# Altium PCB Alt_BRD_PowerModules.PcbDoc
Units mm, origin at the board's own origin, x right, y up, seen from the top; angles counter-clockwise.
Board outline 152.4 x 101.6 mm, 2 copper layers (Top Layer, Bottom Layer); 108 components, 67 nets, 271 pads, 11 vias.
Unrouted connection lines stored in the file: 166.
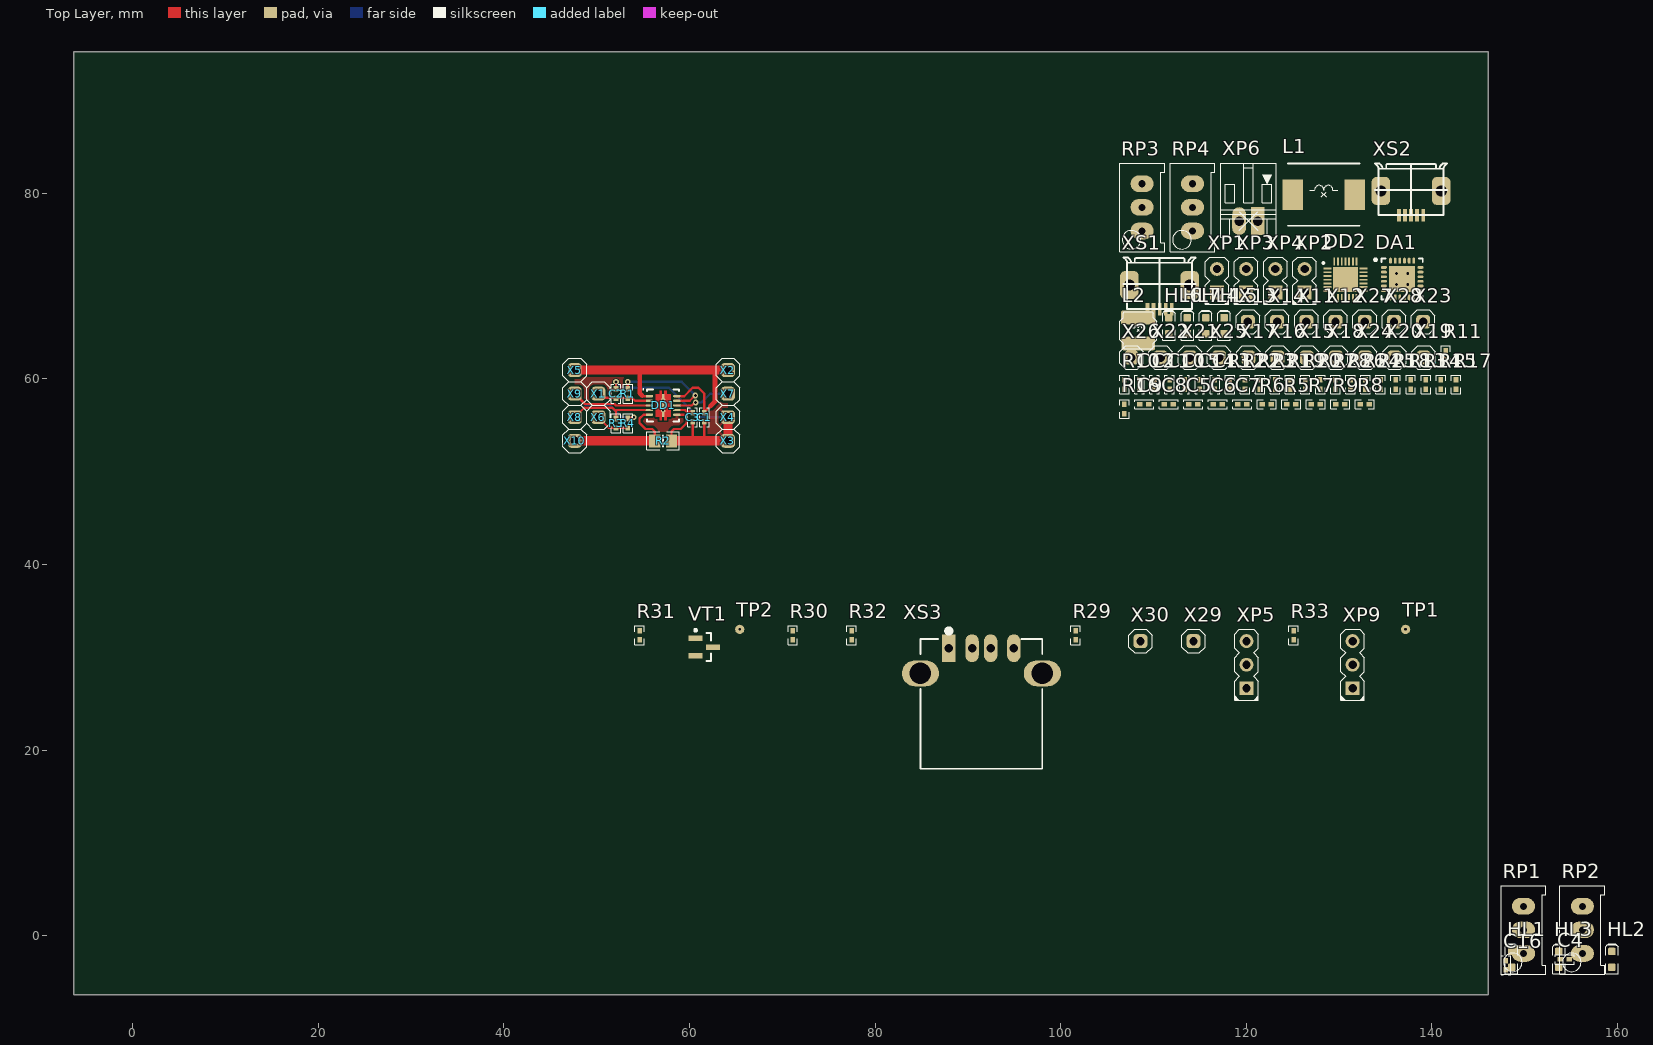
[diagram p0: Top Layer view]
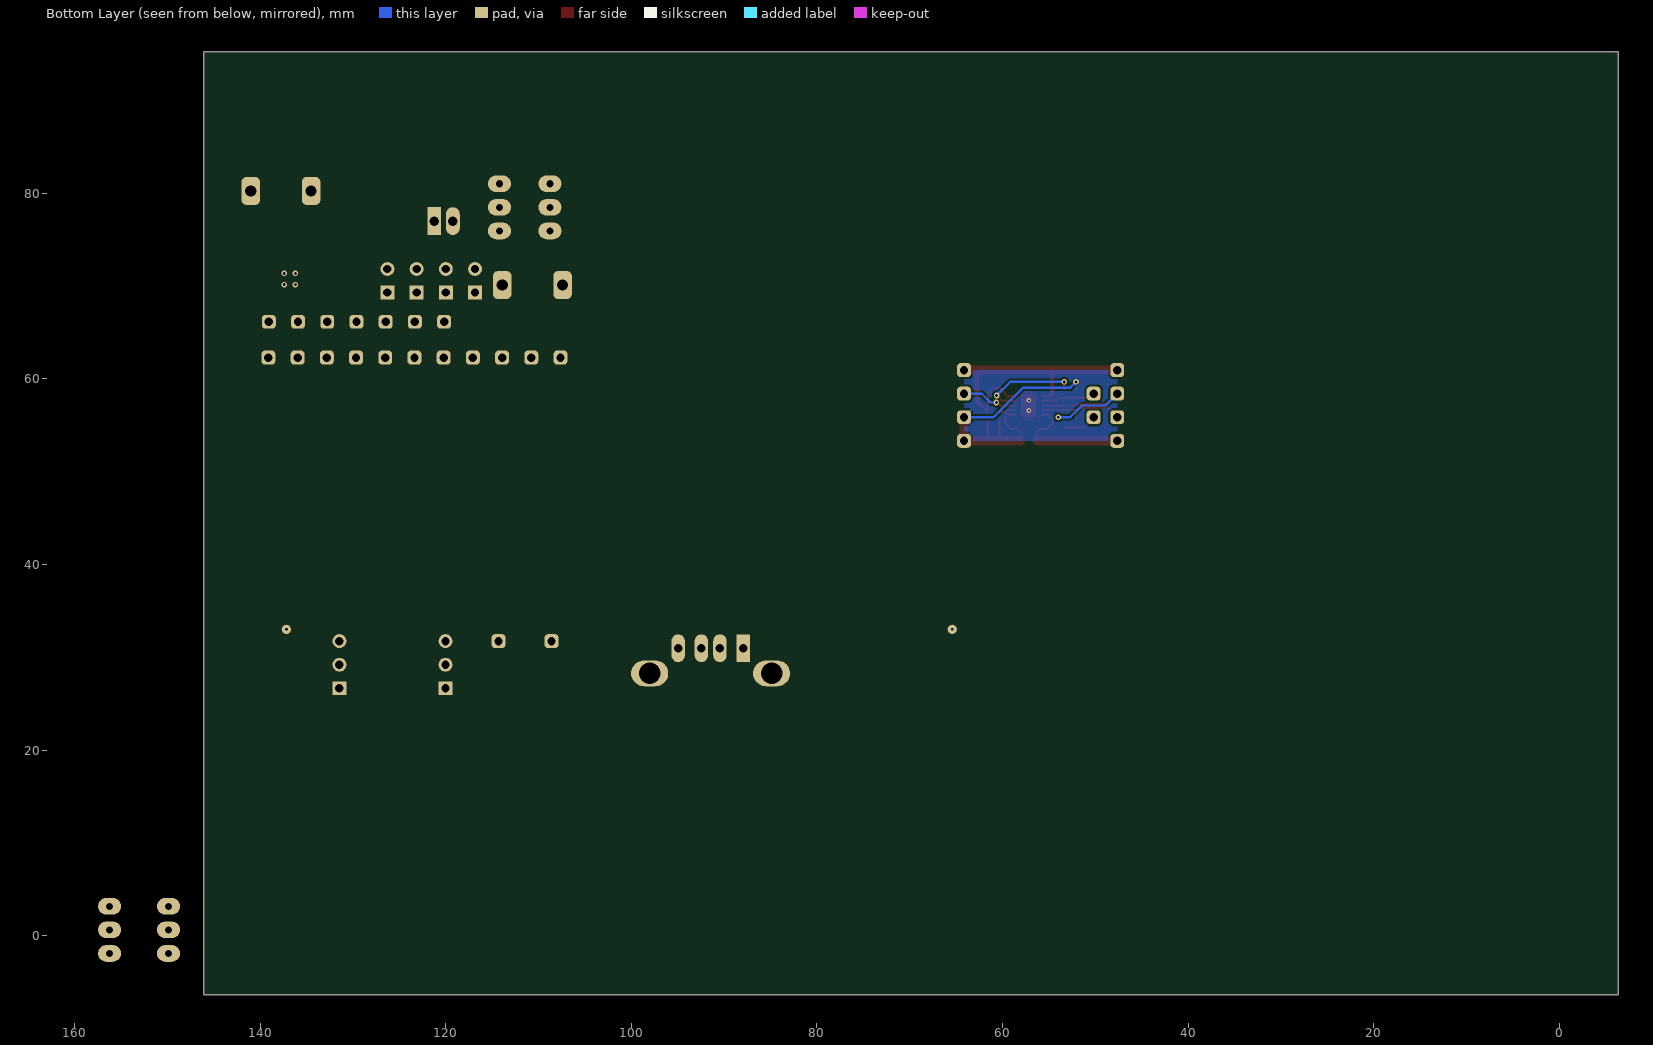
[diagram p1: Bottom Layer view, seen from below]

## Layer stack, top to bottom
Top Solder: solder mask 0.0102, Solder Resist, Dk 3.5
Top Layer: signal copper 0.0356
Dielectric 1: dielectric 0.32, FR-4, Dk 4.8
Bottom Layer: signal copper 0.0356
Bottom Solder: solder mask 0.0102, Solder Resist, Dk 3.5

## Board outline
-6.35,-6.35 146.05,-6.35 146.05,95.25 -6.35,95.25

## Design rules (kind name [scope] priority, off if disabled: settings)
Clearance In_Polygon [InPoly] p1: gap=0.25 ignorepadtopadclearanceinfootprint=FALSE except(0: Arc-Hole Track-Hole SMDPad-Hole THPad-Hole Via-Hole Fill-Hole Poly-Hole Region-Hole Text-Hole)
Clearance [All] p2: gap=0.15 ignorepadtopadclearanceinfootprint=FALSE except(0: Arc-Hole Track-Hole SMDPad-Hole THPad-Hole Via-Hole Fill-Hole Poly-Hole Region-Hole Text-Hole)
PlaneConnect [All] p1: pad.planeconnectstyle=Relief pad.reliefexpansion=0.508 pad.reliefentries=4 pad.reliefconductorwidth=0.254 pad.reliefairgap=0.254 via.planeconnectstyle=Direct via.reliefexpansion=0.508 via.reliefentries=4 via.reliefconductorwidth=0.254 via.reliefairgap=0.254
PolygonConnect [All] p1: thpad.connectstyle=Relief thpad.reliefconductorwidth=0.254 thpad.reliefentries=4 thpad.polygonreliefangle="45 Angle" thpad.airgapwidth=0.254 smdpad.connectstyle=Relief smdpad.reliefconductorwidth=0.254 smdpad.reliefentries=4 smdpad.polygonreliefangle="90 Angle" smdpad.airgapwidth=0.254 via.connectstyle=Direct via.reliefconductorwidth=0.254 via.reliefentries=4 via.polygonreliefangle="90 Angle" via.airgapwidth=0.254
RoutingVias [All] p1: holewidth=0.5 width=0.8 viastyle="Through Hole" minholewidth=0.3 minwidth=0.6 maxholewidth=0.8 maxwidth=1.3
SolderMaskExpansion IsVia [isVia] p1: expansion=0.102 istentingtop=TRUE
SolderMaskExpansion [All] p2: expansion=0.102 istentingtop=FALSE
Width [All] p1: maxlimit=1 minlimit=0.25 preferedwidth=0.5
29 further rules are at their usual default settings.

## Components (designator, comment, footprint, x,y, rotation, side; value= is the part's Value field where it differs from the comment)
C1 "100n 25V" CapKemet1005(0402) 61.595,55.88 r90 top
C2 "10nF" CapKemet1005(0402) 52.07,58.42 r270 top
C3 "100n 25V" CapKemet1005(0402) 60.325,55.88 r90 top
C4 "4.7uF 10V" CapKemet1005(0402) 154.305,-2.54 r0 top
C5 "100n 25V" CapKemet1005(0402) 114.269,57.28 r0 top
C6 "150n" CapKemet1005(0402) 116.909,57.28 r0 top
C7 "1u 10V" CapKemet1005(0402) 119.549,57.28 r0 top
C8 "10u 6.3V 0402" CapKemet1005(0402) 111.629,57.28 r0 top
C9 "1u 10V" CapKemet1005(0402) 108.989,57.28 r0 top
C10 "100n 50V" CapKemet1005(0402) 111.729,59.412 r90 top
C11 "47n 50V" CapKemet1005(0402) 110.105,59.412 r90 top
C12 "4.7u 10v" CapKemet1005(0402) 108.481,59.412 r90 top
C13 "10u 6.3V 0402" CapKemet1005(0402) 116.601,59.412 r90 top
C14 "10u 6.3V 0402" CapKemet1005(0402) 114.977,59.412 r90 top
C15 "10u 6.3V 0402" CapKemet1005(0402) 113.353,59.412 r90 top
C16 "4.7uF 10V" CapKemet1005(0402) 147.955,-3.175 r90 top
DA1 "BQ25606RGER" VQFN-24 136.787,70.772 r0 top
DD1 "MAX17047G+T10" DFN10(3x3)_N 57.15,57.15 r0 top
DD2 "MAX8903AETI+" QFN40P400X400X80-29N 130.677,70.697 r0 top
HL1 "GR-0603" LED-0603-GREEN 148.59,-2.54 r90 top
HL2 "GR-0603" LED-0603-GREEN 159.385,-2.54 r90 top
HL3 "GR-0603" LED-0603-GREEN 153.67,-2.54 r90 top
HL4 "GR-0603" LED-0603-GREEN 115.616,65.747 r90 top
HL5 "GR-0603" LED-0603-GREEN 117.601,65.747 r90 top
HL6 "GR-0603" LED-0603-GREEN 111.646,65.747 r90 top
HL7 "GR-0603" LED-0603-GREEN 113.631,65.747 r90 top
L1 "4.7UH 5A 41 MOHM" INDPM7767X300N 128.335,79.862 r0 top
L2 "1u 3.2A 32.4mOhm" NRS4018 108.349,65.234 r0 top
R1 "10k" "REZKemet 0402" 53.34,58.42 r90 top
R2 "10m 1% 50ppm" RESC2012(0805)N 57.15,53.34 r180 top
R3 "10k" "REZKemet 0402" 52.07,55.245 r90 top
R4 "10k" "REZKemet 0402" 53.34,55.245 r90 top
R5 "10k" "REZKemet 0402" 124.829,57.28 r0 top
R6 "10k" "REZKemet 0402" 122.189,57.28 r0 top
R7 "620" "REZKemet 0402" 127.469,57.28 r0 top
R8 "158" "REZKemet 0402" 132.749,57.28 r0 top
R9 "1k" "REZKemet 0402" 130.109,57.28 r0 top
R10 "221" "REZKemet 0402" 106.857,59.412 r90 top
R11 "2.8k" "REZKemet 0402" 141.485,62.56 r90 top
R12 "2.2k" "REZKemet 0402" 118.225,59.412 r90 top
R13 "2.2k" "REZKemet 0402" 137.713,59.412 r90 top
R14 "10k" "REZKemet 0402" 139.337,59.412 r90 top
R15 "100k" "REZKemet 0402" 140.961,59.412 r90 top
R16 "100k" "REZKemet 0402" 106.857,56.772 r90 top
R17 "10k" "REZKemet 0402" 142.585,59.412 r90 top
R18 "100k" "REZKemet 0402" 136.089,59.412 r90 top
R19 "100k" "REZKemet 0402" 124.721,59.412 r90 top
R20 "680" "REZKemet 0402" 126.345,59.412 r90 top
R21 "680" "REZKemet 0402" 123.097,59.412 r90 top
R22 "12k" "REZKemet 0402" 119.849,59.412 r90 top
R23 "3k" "REZKemet 0402" 121.473,59.412 r90 top
R24 "680" "REZKemet 0402" 132.841,59.412 r90 top
R25 "680" "REZKemet 0402" 134.465,59.412 r90 top
R26 "600" "REZKemet 0402" 131.217,59.412 r90 top
R27 "5.23k" "REZKemet 0402" 127.969,59.412 r90 top
R28 "30.1k" "REZKemet 0402" 129.593,59.412 r90 top
R29 "10k" "REZKemet 0402" 101.6,32.385 r90 top
R30 "121k" "REZKemet 0402" 71.12,32.385 r90 top
R31 "49.9k" "REZKemet 0402" 54.61,32.385 r90 top
R32 "10k" "REZKemet 0402" 77.47,32.385 r90 top
R33 "10k" "REZKemet 0402" 125.095,32.385 r90 top
RP1 "10K" 3296W_1 149.86,0.635 r0 top
RP2 "10K" 3296W_1 156.21,0.635 r0 top
RP3 "10K" 3296W_1 108.764,78.497 r0 top
RP4 "10K" 3296W_1 114.202,78.497 r0 top
TP1 "TP(No BOM)" PLLS1.27-1-R 137.16,33.02 r90 top
TP2 "TP(No BOM)" PLLS1.27-1-R 65.405,33.02 r90 top
VT1 "N-CH  190mА 60V" SOT23-3N 61.595,31.115 r0 top
X1 "X1-PLS-1" HoleSolderPLS-1 50.165,58.42 r0 top
X2 "X1-PLS-1" HoleSolderPLS-1 64.135,60.96 r0 top
X3 "X1-PLS-1" HoleSolderPLS-1 64.135,53.34 r0 top
X4 "X1-PLS-1" HoleSolderPLS-1 64.135,55.88 r0 top
X5 "X1-PLS-1" HoleSolderPLS-1 47.625,60.96 r0 top
X6 "X1-PLS-1" HoleSolderPLS-1 50.165,55.88 r0 top
X7 "X1-PLS-1" HoleSolderPLS-1 64.135,58.42 r0 top
X8 "X1-PLS-1" HoleSolderPLS-1 47.625,55.88 r0 top
X9 "X1-PLS-1" HoleSolderPLS-1 47.625,58.42 r0 top
X10 "X1-PLS-1" HoleSolderPLS-1 47.625,53.34 r0 top
X11 "X1-PLS-1" HoleSolderPLS-1 126.463,66.166 r0 top
X12 "X1-PLS-1" HoleSolderPLS-1 129.611,66.166 r0 top
X13 "X1-PLS-1" HoleSolderPLS-1 120.167,66.166 r0 top
X14 "X1-PLS-1" HoleSolderPLS-1 123.315,66.166 r0 top
X15 "X1-PLS-1" HoleSolderPLS-1 126.507,62.306 r0 top
X16 "X1-PLS-1" HoleSolderPLS-1 123.359,62.306 r0 top
X17 "X1-PLS-1" HoleSolderPLS-1 120.211,62.306 r0 top
X18 "X1-PLS-1" HoleSolderPLS-1 129.655,62.306 r0 top
X19 "X1-PLS-1" HoleSolderPLS-1 139.099,62.306 r0 top
X20 "X1-PLS-1" HoleSolderPLS-1 135.951,62.306 r0 top
X21 "X1-PLS-1" HoleSolderPLS-1 113.915,62.306 r0 top
X22 "X1-PLS-1" HoleSolderPLS-1 110.767,62.306 r0 top
X23 "X1-PLS-1" HoleSolderPLS-1 139.055,66.166 r0 top
X24 "X1-PLS-1" HoleSolderPLS-1 132.803,62.306 r0 top
X25 "X1-PLS-1" HoleSolderPLS-1 117.063,62.306 r0 top
X26 "X1-PLS-1" HoleSolderPLS-1 107.619,62.306 r0 top
X27 "X1-PLS-1" HoleSolderPLS-1 132.759,66.166 r0 top
X28 "X1-PLS-1" HoleSolderPLS-1 135.907,66.166 r0 top
X29 "X1-PLS-1" HoleSolderPLS-1 114.3,31.75 r0 top
X30 "X1-PLS-1" HoleSolderPLS-1 108.585,31.75 r0 top
XP1 "PLS-2_Jump" PLS-2-3D 116.83,69.314 r90 top
XP2 "PLS-2_Jump" PLS-2-3D 126.274,69.314 r90 top
XP3 "PLS-2_Jump" PLS-2-3D 119.978,69.314 r90 top
XP4 "PLS-2_Jump" PLS-2-3D 123.126,69.314 r90 top
XP5 "PLS-3" PLS-3-3D 120.015,26.67 r90 top
XP6 "440055-2" 440055-2 120.225,77.012 r0 top
XP9 "PLS-3" PLS-3-3D 131.445,26.67 r90 top
XS1 "10118193-0001LF" 10118193-0001LF 110.651,70.224 r0 top
XS2 "10118193-0001LF" 10118193-0001LF 137.746,80.362 r0 top
XS3 "USB-A-R" USB-A-S-RA 91.44,29.845 r0 top

## Footprints (in the part's own frame and the unit in brackets; to place one, negate y for a bottom-side part, rotate by r counter-clockwise, add the part's x,y. Pads: shape width x height; smd on the part's side, far side on the other; paste and mask are expansions set on the pad)
3296W_1 [mm] "BOURNS 10-turn trimmer, 3296W type (THT)"
  oval 2.5x1.8 hole 0.762: 1(0,-2.54) 2(0,0) 3(0,2.54)
  silkscreen extent -2.42,-4.77 2.41,4.76, body extent -2.4,-4.77 2.4,4.76, height 11.55
440055-2 [mm] "CONN HEADER 2POS R/A 2MM T/H"
  rect 1.5x3 hole 1: 1(1,0)
  oval 1.5x3 hole 1: 2(-1,0)
  silkscreen extent -3,-1.75 3,6.25
10118193-0001LF [mm]
  rect 0.4x1.35 smd: 1(1.3,-2.7) 2(0.65,-2.7) 3(0,-2.7) 4(-0.65,-2.7) 5(-1.3,-2.7)
  rrect50% 2x3 hole 1.2: 6(-3.25,-0.1) 6(3.25,-0.1)
  silkscreen extent -3.88,-2.7 3.88,2.85, body extent -3.93,-3 3.93,2.66, height 3.18
CapKemet1005(0402) [mm] "Chip Capacitor, Body 1.0x0.5mm, IPC High Density"
  rect 0.6x0.5 smd: 1(-0.5,0) 2(0.5,0)
  silkscreen extent -1.02,-0.51 1.02,0.51, body extent -0.5,-0.3 0.5,0.3, height 0.2
DFN10(3x3)_N [mm] "SON, 10-Leads, Body 3x3mm, Pitch 0.5mm, Thermal Pad 2.45x1.6mm, IPC Medium Density"
  oval 0.8x0.25 smd: 1(-1.475,1) 2(-1.475,0.5) 3(-1.475,0) 4(-1.475,-0.5) 5(-1.475,-1) 6(1.475,-1) 7(1.475,-0.5) 8(1.475,0) 9(1.475,0.5) 10(1.475,1)
  rect 0.25x2.45 smd paste+0 mask+0: 11(0,0)
  Top Layer region: -0.8,-1.225 -0.375,-1.225 -0.375,-1.575 -0.125,-1.575 -0.125,-1.225 0.125,-1.225 0.125,-1.575 0.375,-1.575 0.375,-1.225 0.8,-1.225 0.8,1.225 0.375,1.225 0.375,1.575 0.125,1.575 0.125,1.225 -0.125,1.225 -0.125,1.575 -0.375,1.575 -0.375,1.225 -0.8,1.225
  silkscreen extent -2.17,-1.73 1.73,1.77, body extent -1.51,-1.5 1.51,1.5, height 0.76
HoleSolderPLS-1 [mm] "Connector; Header; 1 Position"
  rrect50% 1.5x1.5 hole 0.9: 1(0,0)
  silkscreen extent -1.27,-1.27 1.27,1.27
INDPM7767X300N [mm]
  rect 2.2x3.25 smd: 1(-3.35,0) 2(3.35,0)
  silkscreen extent -3.85,-3.35 3.85,3.35, body extent -3.85,-3.35 3.85,3.35, height 3
LED-0603-GREEN [mm]
  round 0.254 on Mech15: 0(0,0)
  rrect25% 0.8x0.8 smd: A(-0.85,0) K(0.85,0)
  Top Layer pour cut-out: -0.5,0.5 0.5,0.5 0.5,-0.5 -0.5,-0.5
  silkscreen extent -1.55,-0.67 1.68,0.67, body extent -0.8,-0.4 0.8,0.4, height 0.75
NRS4018 [mm]
  rrect25% 3.6x1.5 smd: 1(0,-1.4)
  rrect25% 3.7x1.5 smd: 2(0,1.4)
  silkscreen extent -2,-2 2,2, body extent -2,-2.2 2,2.2, height 1.8
PLLS1.27-1-R [mm]
  round 1 hole 0.3: 1(0,0)
PLS-2-3D [mm] "Connector; Header; 2 Position"
  rect 1.5x1.5 hole 0.9: 1(0,0)
  round 1.5 hole 0.9: 2(2.54,0)
  silkscreen extent -1.27,-1.27 3.81,1.27, body extent -1.27,-1.27 3.81,1.27, height 8.44
PLS-3-3D [mm] "Connector; Header; 3 Position"
  rect 1.5x1.5 hole 0.9: 1(0,0)
  round 1.5 hole 0.9: 2(2.54,0) 3(5.08,0)
  silkscreen extent -1.27,-1.27 6.35,1.27, body extent -1.27,-1.27 6.35,1.27, height 8.44
QFN40P400X400X80-29N [mm]
  rect 0.85x0.2 smd: 1(-1.95,1.2) 2(-1.95,0.8) 3(-1.95,0.4) 4(-1.95,0) 5(-1.95,-0.4) 6(-1.95,-0.8) 7(-1.95,-1.2) 15(1.95,-1.2) 16(1.95,-0.8) 17(1.95,-0.4) 18(1.95,0) 19(1.95,0.4) 20(1.95,0.8) 21(1.95,1.2)
  rect 0.2x0.85 smd: 8(-1.2,-1.95) 9(-0.8,-1.95) 10(-0.4,-1.95) 11(0,-1.95) 12(0.4,-1.95) 13(0.8,-1.95) 14(1.2,-1.95) 22(1.2,1.95) 23(0.8,1.95) 24(0.4,1.95) 25(0,1.95) 26(-0.4,1.95) 27(-0.8,1.95) 28(-1.2,1.95)
  rect 2.7x2.7 smd: 29(0,0)
  silkscreen extent -2.47,1.7 -2.27,1.9, body extent -2.05,-2.05 2.05,2.05, height 0.8
RESC2012(0805)N [mm] "Chip Resistor, Body 2.0x1.3mm, IPC Medium Density"
  rect 1.2x1.4 smd: 1(-0.9,0) 2(0.9,0)
  silkscreen extent -1.75,-0.97 1.75,0.97, body extent -1,-0.62 1,0.64, height 0.78
"REZKemet 0402" [mm] "Chip Capacitor, Body 1.0x0.5mm, IPC High Density"
  rect 0.6x0.5 smd: 1(-0.5,0) 2(0.5,0)
  silkscreen extent -1.02,-0.51 1.02,0.51, body extent -0.5,-0.3 0.5,0.3, height 0.2
SOT23-3N [mm] "SOT23, 3-Leads, Body 2.9x1.3mm, Pitch 0.95mm, Lead Span 2.5mm, IPC Medium Density"
  rect 1.5x0.6 smd: 1(-0.95,0.95) 2(-0.95,-0.95) 3(0.95,0)
  silkscreen extent -1.07,-1.5 0.7,1.92, body extent -1.57,-1.5 1.57,1.5, height 1
USB-A-S-RA [mm]
  rect 1.45x3 hole 0.92: 1(-3.5,1.144)
  oval 1.45x3 hole 0.92: 2(-1,1.144) 3(1,1.144) 4(3.5,1.144)
  oval 4x2.8 hole 2.3: 5(-6.57,-1.566) 6(6.57,-1.566)
  silkscreen extent -6.57,-11.85 6.57,3.25, body extent -8.12,-11.85 8.12,2.15, height 7.01
VQFN-24 [mm] "QFN, 24-Leads, Body 4x4mm, Pitch 0.5mm, IPC High Density"
  oval 0.65x0.3 smd: 1(-1.975,1.25) 2(-1.975,0.75) 3(-1.975,0.25) 4(-1.975,-0.25) 5(-1.975,-0.75) 6(-1.975,-1.25) 13(1.975,-1.25) 14(1.975,-0.75) 15(1.975,-0.25) 16(1.975,0.25) 17(1.975,0.75) 18(1.975,1.25)
  oval 0.3x0.65 smd: 7(-1.25,-1.975) 8(-0.75,-1.975) 9(-0.25,-1.975) 10(0.25,-1.975) 11(0.75,-1.975) 12(1.25,-1.975) 19(1.25,1.975) 20(0.75,1.975) 21(0.25,1.975) 22(-0.25,1.975) 23(-0.75,1.975) 24(-1.25,1.975)
  rect 2.8x2.8 smd: 25(0,0)
  silkscreen extent -3,-2.22 2.22,2.22, body extent -2.05,-2.07 2.05,2.03, height 1

## Part data
C1 C3 C5: library part 04023C104KAT2A, "0.1µF ±10% 25V Ceramic Capacitor X7R 0402 (1005 Metric)", Digi-Key Part Number=478-7868-1-ND, HelpURL=https://www.digikey.com/en/products/detail/avx-corporation/04023C104KAT2A/3079747, Manufacturer Part Number=04023C104KAT2A, Mouser Part Number=478-7868-1-ND, Part Number=04023C104KAT2A, Price$=0.1
C2: library part CC0402KRX7R9BB103, "10nF 0402 50V X7R  +/-10%", Mouser Part Number=603-CC402KRX7R9BB103, Package=0402, HelpURL=https://eu.mouser.com/ProductDetail/Yageo/CC0402KRX7R9BB103?qs=%2Fha2pyFaduhfwZVzbL0cyr%2Fi%2F48Qij%2FpexQf186TfJSesVd37kSFIA%3D%3D, Manufacturer Part Number=CC0402KRX7R9BB103, Part Number=CC0402KRX7R9BB103, Price$=0.1
C4 C16: library part GRM155R61A475MEAAD, "CAP CER 4.7UF 10V X5R 0402", Digi-Key Part Number=490-14306-1-ND, Package=0402, HelpURL=https://www.digikey.com/product-detail/en/GRM155R61A475MEAAD/490-14306-1-ND/6234742/?itemSeq=332893833, Manufacturer Part Number=GRM155R61A475MEAAD, Part Number=GRM155R61A475MEAAD, Price$=0.04954
C6: library part CAPC1005(0402)N, Package=0402, Part Number=CAPC1005(0402)N
C7: library part CAPC1005(0402)N, "CAP CER 1UF 10V 10% X6S 0402", Manufacturer Part Number=LMK105BJ105KPLF, Mouser Part Number=963-LMK105BJ105KPLF, Package=0402, HelpURL=https://eu.mouser.com/ProductDetail/Taiyo-Yuden/LMK105BJ105KPLF?qs=sGAEpiMZZMs0AnBnWHyRQIHQ3Mw87cdo1QzgwSlYWOQcjHYBR0FFrA%3D%3D, Part Number=CAPC1005(0402)N, Price$=0.11
C8 C13 C14 C15: library part CAPC1005(0402)N, "CAP CER 10UF 6.3V X5R 0402", Digi-Key Part Number=490-13211-1-ND, Manufacturer Part Number=GRJ155R60J106ME11D, Code_JEDEC=0402, HelpURL=https://www.digikey.com/product-detail/en/murata-electronics-north-america/GRJ155R60J106ME11D/490-13211-1-ND/5877419, Part Number=CAPC1005(0402)N, Price$=0.24
C9: library part CAPC1005(0402)N, "CAP CER 1UF 10V 10% X6S 0402", Digi-Key Part Number=1276-6805-1-ND, Manufacturer Part Number=CL05X105KP5NNNC, Code_JEDEC=0402, HelpURL=https://www.digikey.com/product-detail/en/samsung-electro-mechanics/CL05X105KP5NNNC/1276-6805-1-ND/5961664, Part Number=CAPC1005(0402)N, Price$=0.11
C10: library part CAPC1005(0402)N, "CAP CER 0.1UF 25V X5R 0402", Digi-Key Part Number=732-7495-1-ND, Manufacturer Part Number=885012105018, Code_JEDEC=0402, HelpURL=https://www.digikey.com/product-detail/en/wurth-electronics-inc/885012105018/732-7495-1-ND/5454122, Part Number=CAPC1005(0402)N, Price$=0.11
C11: library part CAPC1005(0402)N, "CAP CER 0.047UF 50V X7R 0402", Digi-Key Part Number=490-13297-1-ND, Manufacturer Part Number=GCM155R71H473KE02D, Code_JEDEC=0402, HelpURL=https://www.digikey.com/product-detail/en/murata-electronics-north-america/GCM155R71H473KE02D/490-13297-1-ND/5973321, Part Number=CAPC1005(0402)N, Price$=0.1
C12: library part CAPC1005(0402)N, "CAP CER 4.7UF ±20% 10V X5R 0402", Digi-Key Part Number=490-14306-1-ND, Manufacturer Part Number=GRM155R61A475MEAAD, Code_JEDEC=0402, HelpURL=https://www.digikey.com/product-detail/en/murata-electronics-north-america/GRM155R61A475MEAAD/490-14306-1-ND/6234742, Part Number=CAPC1005(0402)N, Price$=0.23
DA1: "IC BATT CHG LI-ION 1 CELL 24VQFN", Digi-Key Part Number=296-47743-1-ND, HelpURL=https://www.digikey.com/product-detail/en/texas-instruments/BQ25606RGER/296-47743-1-ND/8133092, Manufacturer Part Number=BQ25606RGER, Part Number=BQ25606RGER, Price$=2.76
DD1: "IC BATT MONITOR LI-ION 10TDFN", Digi-Key Part Number=MAX17047G+T10-ND, Package=TDFN-10, HelpURL=https://www.digikey.com/en/products/detail/maxim-integrated/MAX17047G-T10/3758920?s=N4IgTCBcDaILIEEAaBGA7ABgCxpAXQF8g, Manufacturer Part Number=MAX17047G+T10, Part Number=MAX17047G+T10
DD2: "IC BATT CHG LI-ION 1CELL 28TQFN", Digi-Key Part Number=MAX8903AETI+-ND, Manufacturer_Name="Maxim Integrated", Mouser Part Number=700-MAX8903AETI, Datasheet Link=https://componentsearchengine.com/Datasheets/2/MAX8903AETI+.pdf, Height=0.8mm, HelpURL=https://www.digikey.com/en/products/detail/maxim-integrated/MAX8903AETI/2061975, Manufacturer Part Number=MAX8903AETI+, Manufacturer_Part_Number=MAX8903AETI+, Mouser Price/Stock=https://www.mouser.co.uk/ProductDetail/Maxim-Integrated/MAX8903AETI%2b?qs=Mqkh4jHMT8xkuEtUKQzR8g%3D%3D, Part Number=MAX8903AETI+, Price$=4.02000
HL1 HL2 HL3 HL4 HL5 HL6 HL7: library part 150060VS55040, "LED GREEN DIFFUSED 0603 SMD", Digi-Key Part Number=732-12017-1-ND, Mouser Part Number=710-150060VS55040, Package=0603, HelpURL=https://www.mouser.com/ProductDetail/Wurth-Elektronik/150060VS55040?qs=%2Fha2pyFaduhwKZlJ%252BauMPGbe2qb%2FJX%2FXBiS9WUTr3iltzze5OTUvag%3D%3D, Manufacturer Part Number=150060VS55040, Part Number=150060VS55040, Price$=0.115
L1: library part MPLC0730L4R7, "FIXED IND 4.7UH 5A 41 MOHM SMD", Digi-Key Part Number=399-10992-1-ND, Package="SMD 2 pin", HelpURL=https://www.digikey.com/en/products/detail/kemet/MPLC0730L4R7/4506444, LatestRevisionDate=17-Jul-2002, LatestRevisionNote="Re-released for DXP Platform.", Manufacturer Part Number=MPLC0730L4R7, PackageDescription="Axial Device, Thru-Hole; 2 Leads; 0.9 in Pin Spacing", PackageReference=AXIAL-0.9, Part Number=MPLC0730L4R7, Price$=0.39100, Published=24-Mar-1999, Publisher="Altium Limited"
L2: library part NRS4018T1R0NDGJ, "FIXED IND 1UH 3.2A 32.4 MOHM SMD", Digi-Key Part Number=587-2888-1-ND, HelpURL=https://www.digikey.com/product-detail/en/taiyo-yuden/NRS4018T1R0NDGJ/587-2888-1-ND/2649008, Manufacturer Part Number=NRS4018T1R0NDGJ, Part Number=NRS4018T1R0NDGJ, Price$=0.29
R1 R3 R4 R5 R6 R14 R17 R29 R30 R31 R32 R33: library part RESC1005(0402), "RES 10K OHM 1% 1/16W 0402", Manufacturer Part Number=CRCW040210K0FKEDC, Mouser Part Number=71-CRCW040210K0FKEDC, Package=0402, HelpURL=https://eu.mouser.com/ProductDetail/Vishay-Dale/CRCW040210K0FKEDC?qs=sGAEpiMZZMvdGkrng054t0DrEhLhGh8ghRTPC4LoFoV0V5heIyAs3Q%3D%3D, Part Number=RESC1005(0402), Price$=0.1
R2: library part KRL1220E-M-R010-F-T5, "RES SMD 0805 10m 1% 50ppm", Mouser Part Number=408-1544-1-ND, Package=0805, HelpURL=https://www.digikey.com/en/products/detail/susumu/KRL1220E-M-R010-F-T5/3737970, Manufacturer Part Number=KRL1220E-M-R010-F-T5, Part Number=KRL1220E-M-R010-F-T5, Price$=0.09440
R7: library part RESC1005(0402), "RES SMD 620 OHM 1% 1/16W 0402", Digi-Key Part Number=311-620LRCT-ND, Manufacturer Part Number=RC0402FR-07620RL, Code_JEDEC=0402, HelpURL=https://www.digikey.com/product-detail/en/yageo/RC0402FR-07620RL/311-620LRCT-ND/729595, Part Number=RESC1005(0402), Price$=0.1
R8: library part RESC1005(0402), "RES SMD 158 OHM 1% 1/10W 0402", Digi-Key Part Number=P158LCT-ND, Manufacturer Part Number=ERJ-2RKF1580X, Code_JEDEC=0402, HelpURL=https://www.digikey.com/product-detail/en/panasonic-electronic-components/ERJ-2RKF1580X/P158LCT-ND/194195, Part Number=RESC1005(0402), Price$=0.1
R9: library part RESC1005(0402), "RES SMD 1K OHM 0.5% 1/16W 0402", Digi-Key Part Number=RR05P1.0KDCT-ND, Manufacturer Part Number=RR0510P-102-D, Code_JEDEC=0402, HelpURL=https://www.digikey.com/product-detail/en/susumu/RR0510P-102-D/RR05P1.0KDCT-ND/432937, Part Number=RESC1005(0402), Price$=0.1
R10: library part RESC1005(0402), "RES 221 OHM 1% 1/16W 0402", Digi-Key Part Number=RMCF0402FT221RCT-ND, Manufacturer Part Number=RMCF0402FT221R, Code_JEDEC=0402, HelpURL=https://www.digikey.com/product-detail/en/stackpole-electronics-inc/RMCF0402FT221R/RMCF0402FT221RCT-ND/2417580, Part Number=RESC1005(0402), Price$=0.1
R11: library part RESC1005(0402), "RES 2.8K OHM 1% 1/10W 0402", Digi-Key Part Number=2019-RK73H1ETTP2801FCT-ND, Manufacturer Part Number=RK73H1ETTP2801F, Code_JEDEC=0402, HelpURL=https://www.digikey.com/product-detail/en/koa-speer-electronics-inc/RK73H1ETTP2801F/2019-RK73H1ETTP2801FCT-ND/9846507, Part Number=RESC1005(0402), Price$=0.1
R12 R13: library part RESC1005(0402), "RES SMD 2.2K OHM 1% 1/16W 0402", Digi-Key Part Number=311-2.20KLRCT-ND, Manufacturer Part Number=RC0402FR-072K2L, Code_JEDEC=0402, HelpURL=https://www.digikey.com/product-detail/en/yageo/RC0402FR-072K2L/311-2.20KLRCT-ND/729500, Part Number=RESC1005(0402), Price$=0.1
R15 R16 R18 R19 R20 R21 R22 R23 R24 R25 R26: library part RESC1005(0402), Package=0402, Part Number=RESC1005(0402)
R27: library part RESC1005(0402), "RES 5.23K OHM 1% 1/16W 0402", Digi-Key Part Number=RMCF0402FT5K23CT-ND, Manufacturer Part Number=RMCF0402FT5K23, Code_JEDEC=0402, HelpURL=https://www.digikey.com/product-detail/en/stackpole-electronics-inc/RMCF0402FT5K23/RMCF0402FT5K23CT-ND/2417743, Part Number=RESC1005(0402), Price$=0.1
R28: library part RESC1005(0402), "RES 30.1K OHM 1% 1/16W 0402", Digi-Key Part Number=RMCF0402FT30K1CT-ND, Manufacturer Part Number=RMCF0402FT30K1, Code_JEDEC=0402, HelpURL=https://www.digikey.com/product-detail/en/stackpole-electronics-inc/RMCF0402FT30K1/RMCF0402FT30K1CT-ND/4250677, Part Number=RESC1005(0402), Price$=0.1
RP1 RP2 RP3 RP4: "Trimm Res TH 3/8  10K  0,5W  100ppm Vert Adj", Manufacturer Part Number=3296W-1-103LF, Mouser Part Number=652-3296W-1-103LF, HelpURL=https://eu.mouser.com/ProductDetail/Bourns/3296W-1-103LF?qs=CL3xLxiry19Id6AEaxYcng%3D%3D, Part Number=10K
TP1 TP2: library part TP-PLLS1.27-1-R, Part Number=TP-PLLS1.27-1-R
VT1: library part 2N7002NXAKR, "N-Channel 60V 190mA (Ta), 300mA (Tc) 265mW (Ta), 1.33W (Tc) Surface Mount TO-236AB", Digi-Key Part Number=1727-8643-1-ND, Package=SOT-23-3, HelpURL=https://www.digikey.com/product-detail/en/nexperia-usa-inc/2N7002NXAKR/1727-8643-1-ND/10416560, Manufacturer Part Number=2N7002NXAKR, Part Number=2N7002NXAKR, Price$=0.01740
X1 X2 X3 X4 X5 X6 X7 X8 X9 X10 X11 X12 X13 X14 X15 X16 X17 X18 X19 X20 X21 X22 X23 X24 X25 X26 X27 X28 X29 X30: "контакт под пайку", Part Number=X1-PLS-1
XP1 XP2 XP3 XP4: "CONN HEADER VERT 2POS 2.54MM", Digi-Key Part Number=S1011EC-02-ND, Manufacturer Part Number=PRPC002SAAN-RC, Package="Header 2POS 2.54mm", HelpURL=https://www.digikey.com/product-detail/en/sullins-connector-solutions/PRPC002SAAN-RC/S1011EC-02-ND/2775252, Part Number=PLS-2_Jump, Price$=0.08
XP5 XP9: library part PR20203VBNN, "CONN HEADER VERT 3POS 2.54MM", Digi-Key Part Number=1849-1003-ND, Package="Header 3POS 2.54mm", HelpURL=https://www.digikey.com/product-detail/en/metz-connect-usa-inc/PR20203VBNN/1849-1003-ND/7794768, Manufacturer Part Number=PR20203VBNN, Part Number=PR20203VBNN
XP6: "CONN HEADER 2POS R/A 2MM T/H", Digi-Key Part Number=A100043-ND, HelpURL=https://www.digikey.com/product-detail/en/440055-2/A100043-ND/2077946/?itemSeq=274020277, Manufacturer Part Number=440055-2, Part Number=440055-2, Price$=0.17
XS1 XS2: "CONN RCPT USB2.0 MICRO B SMD R/A", Digi-Key Part Number=609-4616-1-ND, HelpURL=https://www.digikey.com/en/products/detail/amphenol-icc-fci/10118193-0001LF/2785388, Manufacturer Part Number=10118193-0001LF, Part Number=10118193-0001LF, Price$=0.26488
XS3: library part CU01SAH0S00, "USB TYPE-A SINGLE PORT RIGHT ANG", Digi-Key Part Number=2987-CU01SAH0S00-ND, Package=TH-6pin, HelpURL=https://www.digikey.com/en/products/detail/cvilux-usa/CU01SAH0S00/13177442, Manufacturer Part Number=CU01SAH0S00, Part Number=CU01SAH0S00, Price$=0.23100

## Via types
v1: diameter 0.6, hole 0.3, Top Layer to Bottom Layer, tented both sides, 9 vias
v2: diameter 0.5, hole 0.2, Top Layer to Bottom Layer, tented both sides, 2 vias

## Nets (pads, with @x,y where several pads share a name; then routed paths per layer and width w, separated by ;. In a path a pad name is that pad's centre, name@x,y a point inside that pad or via, vN(x,y) a via of type N, cw(c..) or ccw(c..) an arc to the next point about the centre after c; other vN are vias at no path point)
GND: C4.1 C6.1 C7.1 C8.1 C9.1 C10.2 C12.1 C13.1 C14.1 C15.1 C16.1 DA1.17 DA1.18 DA1.25 DD1.5 DD2.1 DD2.2 DD2.12 DD2.29 HL1.K R2.2 R9.1 R11.1 R17.2 R23.1 R26.1 R28.2 R31.2 R33.2 RP1.3 RP2.3 VT1.2 X10.1 X12.1 X14.1 X16.1 X18.1 X20.1 X26.1 X28.1 X30.1 XP1.1 XP2.1 XP3.1 XP4.1 XP6.2 XP9.1 XS1.5 XS1.6 XS2.5 XS2.6 XS3.4 XS3.5 | length 13.4
  Top Layer w0.25: DD1.5 55.026,56.15 54.61,55.734 54.61,55.245 55.245,54.61 55.985,54.61 56.25,54.345 R2.2
  Top Layer w1: X10.1 56.15,53.34 R2.2
  other v1: 136.187,70.172 137.387,70.172 136.187,71.372 137.387,71.372
NetC1_1: C1.1 C2.1 C3.1 DD1.6 DD1.11 R2.1 X3.1 X4.1 | length 31.9
  Top Layer w0.25: C2.1 v1(52.07,59.69) ; R2.1 58.05,54.345 58.315,54.61 59.055,54.61 59.69,55.245 59.69,55.88 59.42,56.15 DD1.6 ; 60.325,53.34 C3.1 ; 61.595,53.34 C1.1
  Top Layer w1: R2.1 60.325,53.34 61.595,53.34 X3.1 X4.1
  Bottom Layer w0.25: v1(52.07,59.69) 52.705,59.055 57.785,59.055 60.96,55.88 X4.1
  other v2: 57.15,56.6 57.15,57.7
NetC1_2: C1.2 DD1.1 DD1.10 X2.1 X5.1 | length 31.2
  Top Layer w0.25: 54.88,58.175 54.905,58.15 DD1.1 ; DD1.10 59.42,58.15 60.325,59.055 60.96,59.055 61.595,58.42 C1.2@61.595,56.43 ; C1.2 C1.2@61.595,56.43 ; 62.23,57.065 C1.2@61.595,56.43
  Top Layer w0.5: 54.61,60.96 54.61,58.445 54.88,58.175 ; 62.23,57.065 62.745,57.58 62.745,60.96
  Top Layer w1: X5.1 54.61,60.96 62.745,60.96 ; 62.391,60.96 X2.1
NetC2_2: C2.2 DD1.2 R1.1 X1.1 | length 5.9
  Top Layer w0.25: X1.1 50.609,57.976 52.014,57.976 C2.2 ; C2.2@52.064,57.976 53.34,57.976 53.374,57.941 53.819,57.941 54.11,57.65 DD1.2
NetC3_2: C3.2 DD1.7 | length 1.8
  Top Layer w0.25: DD1.7 59.502,56.65 59.7,56.453 60.252,56.453 C3.2
NetC4_2: C4.2 DD2.17 R6.1 XS2.1
NetC5_1: C5.1 DD2.6
NetC5_2: C5.2 DD2.27 DD2.28 L1.2
NetC6_2: C6.2 DD2.10
NetC7_2: C7.2 DD2.9 R14.2
NetC8_2: C8.2 DA1.23
NetC9_2: C9.2 C10.1 DA1.1 DA1.24 R5.1 R7.2 R29.2 R30.1 XP5.2 XS3.1
NetC11_1: C11.1 DA1.19 DA1.20 L2.1
NetC11_2: C11.2 DA1.21
NetC12_2: C12.2 DA1.22 R27.1
NetC13_2: C13.2 C15.2 DA1.15 DA1.16 HL2.A HL3.A L2.2 R29.1 R32.2 X25.1
NetC14_2: C14.2 DA1.13 DA1.14 X27.1
NetC16_2: C16.2 DD2.3 DD2.4 X15.1
NetDA1_5: DA1.5 R12.1
NetDA1_6: DA1.6 R32.1 VT1.3
NetDA1_7: DA1.7 R13.1
NetDA1_8: DA1.8 R8.2
NetDA1_9: DA1.9
NetDA1_10: DA1.10 R10.2
NetDA1_11: DA1.11 R27.2 R28.1 XP6.1
NetDA1_12: DA1.12 XP9.2
NetDD1_3: DD1.3 R4.2 X9.1 | length 16.7
  Top Layer w0.25: X9.1 48.74,57.305 51.915,57.305 52.07,57.15 DD1.3 ; R4.2 53.408,55.813 53.908,55.813 v1(53.975,55.88)
  Bottom Layer w0.25: X9.1 48.895,57.15 51.435,57.15 52.705,55.88 v1(53.975,55.88)
NetDD1_4: DD1.4 R3.2 X8.1 | length 9.5
  Top Layer w0.25: X8.1 48.65,56.905 51.68,56.905 51.935,56.65 ; R3.2 52.07,56.515 51.935,56.65 ; DD1.4 51.935,56.65
NetDD1_8: DD1.8 X7.1 | length 6.2
  Top Layer w0.25: DD1.8 60.23,57.15 60.548,57.468 v1(60.642,57.468) ; X7.1@64.025,58.31 X7.1
  Bottom Layer w0.25: v1(60.642,57.468) 61.277,57.468 62.23,58.42 X7.1
NetDD1_9: DD1.9 R1.2 | length 10.9
  Top Layer w0.25: R1.2 v1(53.34,59.69) ; DD1.9 60.012,57.65 60.579,58.217 v1(60.623,58.217)
  Bottom Layer w0.25: v1(53.34,59.69) 59.15,59.69 v1(60.623,58.217)
NetDD2_5: DD2.5 XP1.2
NetDD2_7: DD2.7 XP3.2
NetDD2_8: DD2.8 HL5.K R16.1 X23.1
NetDD2_11: DD2.11 R22.2
NetDD2_13: DD2.13 RP4.1
NetDD2_14: DD2.14 XP4.2
NetDD2_15: DD2.15 XP2.2
NetDD2_16: DD2.16 R14.1 R17.1 X17.1
NetDD2_18: DD2.18 HL7.K R19.1 X21.1
NetDD2_19: DD2.19 HL6.K R18.1 X22.1
NetDD2_20: DD2.20 DD2.21 X11.1
NetDD2_22: DD2.22 HL4.K R15.1 X24.1
NetDD2_23: DD2.23 DD2.24 R15.2 R16.2 R18.2 R19.2 R20.2 R21.2 R24.2 R25.2 X19.1
NetDD2_25: DD2.25 DD2.26 L1.1
NetHL1_A: HL1.A R7.1
NetHL2_K: HL2.K R12.2
NetHL3_K: HL3.K R13.2
NetHL4_A: HL4.A R20.1
NetHL5_A: HL5.A R21.1
NetHL6_A: HL6.A R24.1
NetHL7_A: HL7.A R25.1
NetR3_1: R3.1 R4.1 X6.1 | length 4
  Top Layer w0.25: X6.1@50.415,56.13 X6.1 51.3,54.745 R3.1 R4.1
NetR5_2: R5.2 XS3.3
NetR6_2: R6.2 XS2.3
NetR8_1: R8.1 R9.2 RP1.1 RP1.2
NetR10_1: R10.1 R11.2 RP2.1 RP2.2
NetR22_1: R22.1 RP3.1
NetR23_2: R23.2 RP3.2 RP3.3
NetR26_2: R26.2 RP4.2 RP4.3
NetR30_2: R30.2 R31.1 VT1.1
NetR33_1: R33.1 XP9.3
NetTP1_1: TP1.1 XS1.4
NetTP2_1: TP2.1 XS3.2
NetX13_1: X13.1 XP5.3 XS1.1
NetX29_1: X29.1 XP5.1
usbD+_to_chg: DA1.3 XS1.3
usbD-_to_chg: DA1.4 XS1.2
pads on no net: DA1.2 HL1.0 HL2.0 HL3.0 HL4.0 HL5.0 HL6.0 HL7.0 XS2.2 XS2.4 XS3.6

## Polygon pours and split planes (outlines as drawn)
NetC1_1 on Bottom Layer "NETC1_1_L02_P000" (solid, remove dead copper, pour order 0): 47.625,60.96 64.135,60.96 64.135,53.34 47.625,53.34
NetC1_1 on Top Layer "NETC1_1_L01_P002" (solid, remove dead copper, pour order 2): 47.625,60.96 64.135,60.96 64.135,53.34 47.625,53.34